# EAGLE board Board - Remote Monitoring Hardware (EAGLE 8.1.0)
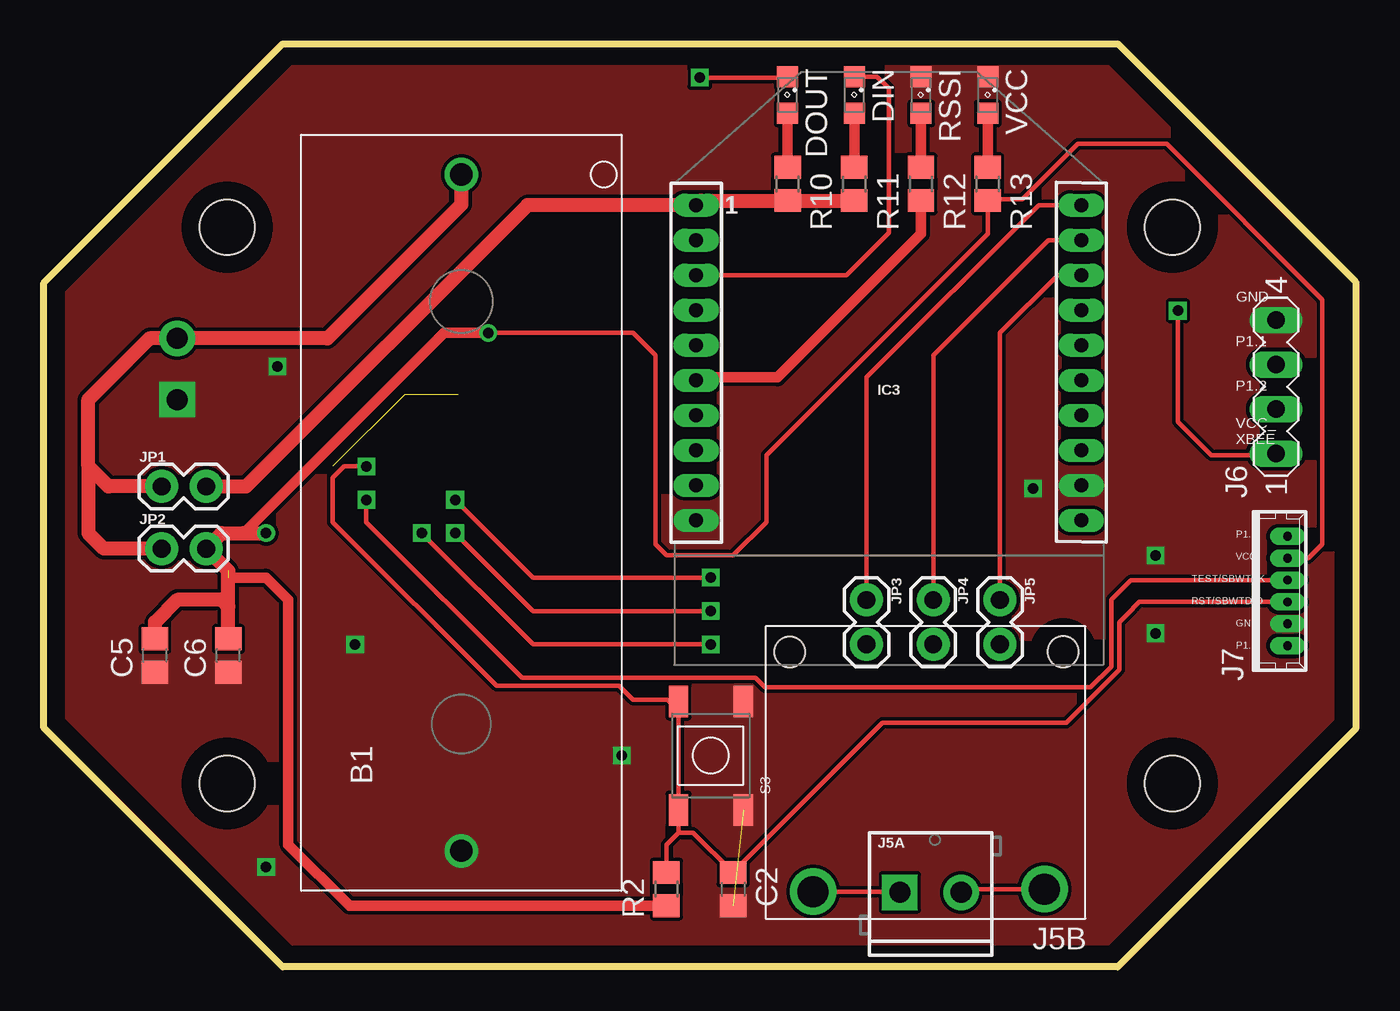
[diagram p0: board, top side]
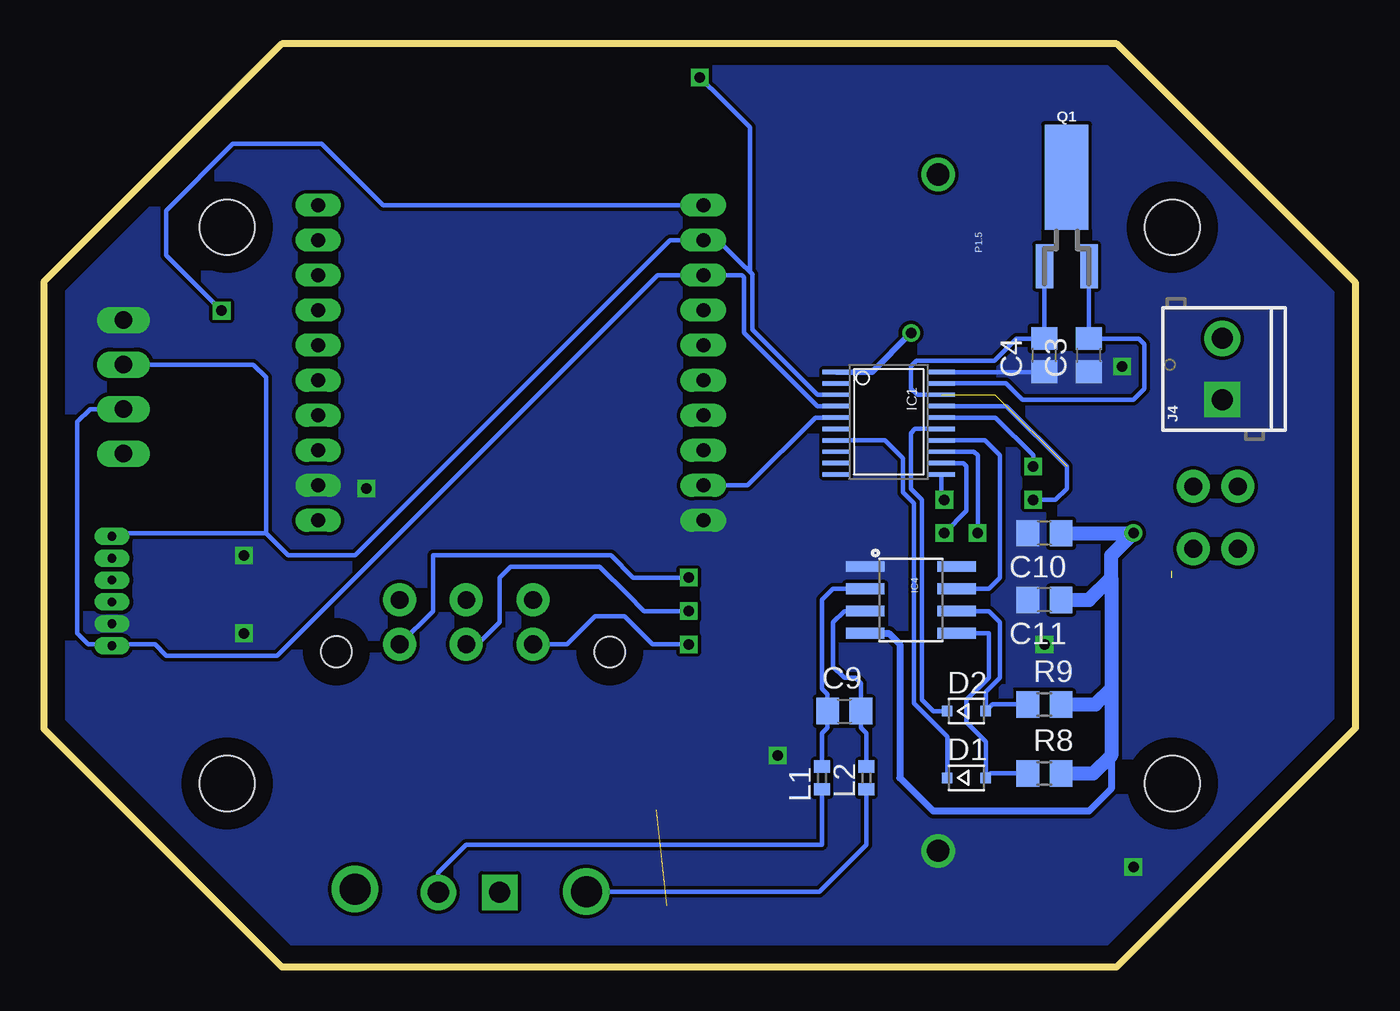
[diagram p1: board, bottom side, seen from below]

Size 74.93 x 52.7 mm. Coordinates in mm from the lower left corner, seen from the top.
Outline: 13.65,52.7 61.34,52.7 74.93,39.12 74.93,13.59 61.34,0 13.65,0 0,13.65 0,39.05 13.65,52.7
Copper layers (1*16): Top 0.035mm / dielectric 1.5mm / Bottom 0.035mm
Design rules "default *": minimum track width 7mil, minimum drill 7mil, track to track 5mil, track to pad 5mil, pad to pad 5mil, via to via 5mil, smd to smd 5mil, copper to edge 40mil, drill to drill 8mil, minimum pad ring 10mil, minimum via ring 8mil, stop-mask expansion 4mil, vias tented up to drill 0mil, thermal gap 10mil
Net classes: 0 default: width 0.203 mm, clearance 0.205 mm; 1 vcc: width 0.305 mm
Holes 3.17 mm at 10.48,42.23 64.45,42.23 64.45,10.48 10.48,10.48

## Footprints (pad centres in the part's own frame; a part is rotated, then mirrored left to right if it is on the bottom)
BATT_HLDR_2/3A_THRUHOLE = drill 1.27: NEG -19.05,0; POS 19.558,0
C0805 = smd 1.3 x 1.5: 1 -0.95,0; 2 0.95,0
SOD323-R = smd 0.6 x 0.6: A 1.1,0; C -1.1,0
SML0805 = smd 1.2 x 1.2: A 1.05,0; C -1.05,0
MSP430G2553IPW20 = smd 1.55 x 0.25: 1 -3,2.85; 2 -3,2.2; 3 -3,1.55; 4 -3,0.9; 5 -3,0.25; 6 -3,-0.4; 7 -3,-1.05; 8 -3,-1.7; 9 -3,-2.35; 10 -3,-3; 11 3,-3; 12 3,-2.35; 13 3,-1.7; 14 3,-1.05; 15 3,-0.4; 16 3,0.25; 17 3,0.9; 18 3,1.55; 19 3,2.2; 20 3,2.85
XBEE-LONGPAD = drill 0.8 pad 1.206 long: 1 -11,20; 2 -11,18; 3 -11,16; 4 -11,14; 5 -11,12; 6 -11,10; 7 -11,8; 8 -11,6; 9 -11,4; 10 -11,2; 11 11,2; 12 11,4; 13 11,6; 14 11,8; 15 11,10; 16 11,12; 17 11,14; 18 11,16; 19 11,18; 20 11,20
SOIC8 = smd 0.61 x 2.21: 1 -1.905,-2.616; 2 -0.635,-2.616; 3 0.635,-2.616; 4 1.905,-2.616; 5 1.905,2.616; 6 0.635,2.616; 7 -0.635,2.616; 8 -1.905,2.616
SCREWTERMINAL-3.5MM-2 = drill 1.2 pad 2.032 square: 1 0,0 | drill 1.2 pad 2.032: 2 3.5,0
PCC-SMP = drill 1.77 pad 2.54: T+ 13.207,0.14; T- 0,0 | hole 1.77: 14.542,-13.542; -1.068,-13.552
MA04-1 = drill 1.016 long: 1 -3.81,0; 2 -1.27,0; 3 1.27,0; 4 3.81,0
53047-06 = drill 0.5 pad 0.698 long: 1 3.125,0.45; 2 1.875,0.45; 3 0.625,0.45; 4 -0.625,0.45; 5 -1.875,0.45; 6 -3.125,0.45
1X02 = drill 1.016 pad 1.88: 1 0,0; 2 2.54,0
0402 = smd 0.7 x 0.9: 1 -0.65,0; 2 0.65,0
CRYSTAL-SMD-2X6-CYL = smd 2.5 x 6: SHEILD 0,5.08 | smd 1 x 2.5: X1 -1.27,0; X2 1.27,0
R0805 = smd 1.3 x 1.5: 1 -0.95,0; 2 0.95,0
KPT-1187B = smd 1.8 x 1.1: 1 -3.1,1.85; 2 3.1,1.85; 3 -3.1,-1.85; 4 3.1,-1.85

## Placement (x,y rotation side)
B1  BATT_HLDR_2/3A_THRUHOLE  [BATT_HLDR_2/3A_THRUHOLE]  23.85,25.68 90 top
C2  1nF  [C0805]  39.37,4.45 270 top
C3  12pF  [C0805]  15.24,34.92 90 bottom
C4  12pF  [C0805]  17.78,34.92 90 bottom
C5  10uF/10V  [C0805]  6.35,17.78 90 top
C6  100nF  [C0805]  10.54,17.78 90 top
C9  0.01uF  [C0805]  29.21,14.61 0 bottom
C10  10uF  [C0805]  17.78,24.77 180 bottom
C11  10uF  [C0805]  17.78,20.95 180 bottom
D1  1N4148  [SOD323-R]  22.23,10.79 0 bottom
D2  1N4148  [SOD323-R]  22.23,14.61 0 bottom
DIN  LED4  [SML0805]  46.29,49.78 270 top
DOUT  LED3  [SML0805]  42.48,49.78 270 top
IC1  MSP430G2553  [MSP430G2553IPW20]  26.67,31.11 0 bottom
IC3  Xbee S3 Socket  [XBEE-LONGPAD]  48.26,23.5 0 top
IC4  MAX31855T  [SOIC8]  25.4,20.95 270 bottom
J4  [SCREWTERMINAL-3.5MM-2]  7.62,32.38 90 bottom
J5A  [SCREWTERMINAL-3.5MM-2]  48.9,4.25 0 top
J5B  PCC-SMP  [PCC-SMP]  57.15,4.45 180 top
J6  [MA04-1]  70.38,33.12 90 top
J7  [53047-06]  70.59,21.46 270 top
JP1  [1X02]  6.73,27.43 0 top
JP2  [1X02]  6.73,23.88 0 top
JP3  [1X02]  46.99,20.95 270 top
JP4  [1X02]  50.8,20.95 270 top
JP5  [1X02]  54.61,20.95 270 top
L1  Ferrite  [0402]  30.48,10.79 270 bottom
L2  Ferrite  [0402]  27.94,10.79 90 bottom
Q1  32.768kHz  [CRYSTAL-SMD-2X6-CYL]  16.51,40 0 bottom
R2  47k  [R0805]  35.56,4.45 270 top
R8  10k  [R0805]  17.78,11.05 0 bottom
R9  10k  [R0805]  17.78,14.99 0 bottom
R10  1k  [R0805]  42.48,44.7 270 top
R11  1k  [R0805]  46.29,44.7 270 top
R12  1k  [R0805]  50.1,44.7 270 top
R13  1k  [R0805]  53.91,44.7 270 top
RSSI  LED5  [SML0805]  50.1,49.78 270 top
S3  SMD-PUSHBTN-SWTVER1  [KPT-1187B]  38.1,12.06 90 top
VCC  LED7  [SML0805]  53.91,49.78 270 top

## Library data of the parts
B1 IC1 J5B S3 = custom parts
C2-C6 C9-C11 = eagle-ltspice; SPICEMODEL: NONE; SPICEPREFIX: C
D1 D2 = diode
DIN DOUT RSSI VCC = led
IC3 = SparkFun-RF
IC4 = SparkFun-Retired; PROD_ID: IC-12512
J4 J5A = SparkFun-Connectors; PROD_ID: CONN-08399
J6 = con-lstb; OC_FARNELL: unknown; OC_NEWARK: unknown
J7 = con-molex; MPN: 53047-0610-C; OC_FARNELL: 9733078; OC_NEWARK: 03M2965
JP1-JP5 = SparkFun-Retired
L1 L2 = inductors
Q1 = SparkFun-Clocks; PROD_ID: XTAL-07894
R2 R8-R13 = eagle-ltspice; SPICEMODEL: NONE; SPICEPREFIX: R

## Nets
1: D1.A IC4.5 R8.1
2: D2.A IC4.6 R9.1
DIO0: IC3.20 JP3.1
DIO1: IC3.19 JP4.1
DIO2: IC3.18 JP5.1
DIO3: IC3.17
DIO4: IC3.11
DIO5: IC3.15
DIO9: IC3.13
DIO11: IC3.7
DIO12: IC3.4
GND: B1.NEG C2.2 C3.1 C4.1 C5.1 C6.1 C10.2 C11.2 IC1.20 IC3.10 IC3.12 IC4.1 J4.1 J6.4 J7.2 RSSI.C S3.3 S3.4 VCC.C
N$1: B1.POS J4.2 JP1.1 JP2.1
N$4: DOUT.A R10.1
N$10: DIN.A R11.1
N$11: R12.1 RSSI.A
N$12: C9.1 IC4.2 L1.1
N$13: C9.2 IC4.3 L2.2
N$14: J5A.2 J5B.T- L1.2
N$15: J5A.1 J5B.T+ L2.1
N$17: R13.1 VCC.A
P1.0: IC1.2
P1.1: DOUT.C IC1.3 IC3.2 J6.3 J7.6
P1.2: DIN.C IC1.4 IC3.3 J6.2 J7.1
P1.3: IC1.5 IC3.9
P1.4: IC1.6
P1.5: D1.C IC1.7
P1.6: IC1.14 IC4.7
P1.7: D2.C IC1.15
P2.0: IC1.8
P2.1: IC1.9
P2.2: IC1.10
P2.3: IC1.11 JP5.2
P2.4: IC1.12 JP4.2
P2.5: IC1.13 JP3.2
RES1: IC3.8
RES2: IC3.14
RESET: IC3.5
RSSI: IC3.6 R12.2
RST/SBWTDIO: C2.1 IC1.16 J7.3 R2.1 S3.1 S3.2
RTS: IC3.16
TEST/SBWTCK: IC1.17 J7.4
VCC: C5.2 C6.2 C10.1 C11.1 IC1.1 IC4.4 J7.5 JP2.2 R2.2 R8.2 R9.2 R13.2
VCC_XBEE: IC3.1 J6.1 JP1.2 R10.2 R11.2
XINR: C3.2 IC1.19 Q1.X2
XOUTR: C4.2 IC1.18 Q1.X1

## Tracks (layer width: path | path; a pad name or v marks a point on that pad's centre or on a via)
1
  Bottom 0.254: R8.1 20.87,11.05 D1.A 21.13,12.87 22.23,13.97 22.23,15.25 20.96,16.52 20.96,19.04 | 20.96,19.04 20.96,19.05 | IC4.5 20.97,19.05 20.96,19.04
2
  Bottom 0.254: R9.1 20.74,14.99 D2.A 21.13,15.71 20.32,16.51 20.32,19.68 20.96,20.32 IC4.6
DIO0
  Top 0.254: 58.1,43.5 IC3.20 56.83,43.5 46.99,33.66 JP3.1
DIO1
  Top 0.254: JP4.1 50.8,34.92 57.37,41.49 IC3.19
DIO2
  Top 0.254: IC3.18 57.91,39.49 54.61,36.2 JP5.1
GND  (via drill 0.6)  (1 unrouted)
  Bottom 0.254: IC1.20 C4.1
  other vias: 63.5,19.05 56.52,27.3 33.02,12.06 12.7,5.71 17.78,18.41 13.34,34.29 63.5,23.5
  pour Top (no thermals): 0,38.73 0,13.33 0.32,13.33 13.97,-0.32 61.21,-0.32 61.53,-0.64 61.53,0.06 75.18,13.72 75.18,39.18 75.76,39.75 74.49,39.75 61.53,52.7 13.97,52.7
  pour Bottom (no thermals): 0,38.73 0,13.33 13.97,-0.64 60.96,-0.64 74.93,13.33 74.93,38.73 60.96,52.7 13.97,52.7
N$1
  Top 0.813: B1.POS 23.85,43.54 16.2,35.88 J4.2 6.04,35.88 2.54,32.38 2.54,28.57 | 2.54,28.57 2.54,24.77 3.43,23.88 JP2.1 | JP1.1 3.68,27.43 2.54,28.57
N$4
  Top 0.61: R10.1 DOUT.A
N$10
  Top 0.61: R11.1 DIN.A
N$11
  Top 0.61: R12.1 RSSI.A
N$12
  Bottom 0.254: L1.1 30.48,13.33 30.16,13.65 C9.1 30.16,15.55 30.48,15.88 30.48,20.95 29.85,21.59 IC4.2
N$13
  Bottom 0.254: L2.2 27.94,13.33 28.26,13.65 C9.2 28.26,16.2 28.58,16.51 29.21,16.51 29.85,17.14 29.85,19.68 29.21,20.32 IC4.3
N$14
  Top 0.254: J5B.T- 52.59,4.45 J5A.2
  Bottom 0.254: J5A.2 52.4,5.39 52.07,5.71 | 52.07,5.71 50.8,6.98 | L1.2 30.48,6.98 50.8,6.98 | 50.8,6.98 52.07,5.71
N$15
  Top 0.254: J5B.T+ 48.85,4.3 J5A.1
  Bottom 0.254: L2.1 27.94,6.98 30.62,4.3 J5B.T+
N$17
  Top 0.61: R13.1 VCC.A
P1.1  (via drill 0.6)
  Top 0.254: v37.47,50.77 42.42,50.77 DOUT.C
  Bottom 0.254: 34.6,39.7 34.86,39.95 34.87,39.95 36.42,41.49 IC3.2 39.15,41.49 57.15,23.5 60.96,23.5 62.23,24.77 | 34.6,39.7 34.47,39.56 34.47,36.38 30.75,32.66 IC1.3 | 34.6,39.7 34.6,47.94 36.83,50.16 36.86,50.16 v37.47,50.77 | 70.86,24.77 J7.6 70.86,24.77 | 62.23,24.77 62.23,33.66 62.97,34.39 J6.3 | 62.23,24.77 70.86,24.77
P1.2
  Top 0.254: DIN.C 47.59,50.83 48.26,50.16 48.26,41.91 45.85,39.49 IC3.3
  Bottom 0.254: IC1.4 30.75,32.02 34.93,36.2 34.93,39.37 35.05,39.49 IC3.3 39.88,39.49 61.6,17.78 67.95,17.78 68.58,18.41 70.96,18.41 | J7.1 70.96,18.41 | 70.96,18.41 J7.1 | J6.2 72.29,31.85 73.03,31.11 73.03,19.05 72.39,18.41 71.11,18.41 J7.1
P1.3
  Bottom 0.254: IC1.5 30.87,31.36 34.74,27.5 IC3.9
P1.5
  Bottom 0.254: D1.C 23.33,13.15 25.22,15.05 25.22,26.48 25.86,27.11 25.86,29.03 | IC1.7 26.89,30.06 26.04,29.21 | 26.04,29.21 25.86,29.03 | 25.86,29.03 26.04,29.21
P1.6
  Bottom 0.254: IC4.7 20.96,21.59 20.32,22.23 20.32,29.21 21.18,30.06 IC1.14
P1.7
  Bottom 0.254: IC1.15 25.17,30.71 25.4,30.48 25.4,27.3 24.77,26.67 24.77,15.24 24.13,14.61 D2.C
P2.3  (via drill 0.6)
  Top 0.254: v23.5,26.67 27.94,22.23 v38.1,22.23
  Bottom 0.254: IC1.11 23.67,26.84 v23.5,26.67 | JP5.2 52.71,20.32 52.71,23.5 42.55,23.5 41.28,22.23 v38.1,22.23
P2.4  (via drill 0.6)
  Top 0.254: v23.5,24.77 27.94,20.32 v38.1,20.32
  Bottom 0.254: IC1.12 22.42,28.77 22.23,28.57 22.23,26.04 v23.5,24.77 | JP4.2 50.17,18.41 48.9,19.68 48.9,22.23 48.26,22.86 43.18,22.86 41.59,21.27 | 41.91,21.59 41.59,21.27 | 41.59,21.27 40.64,20.32 v38.1,20.32
P2.5  (via drill 0.6)
  Top 0.254: v21.59,24.77 27.94,18.41 v38.1,18.41
  Bottom 0.254: IC1.13 21.8,29.41 21.59,29.21 v21.59,24.77 | JP3.2 45.05,18.41 43.45,20.02 41.77,20.02 40.17,18.41 v38.1,18.41
RSSI
  Top 0.61: R12.2 50.1,41.85 41.91,33.66 37.42,33.66 IC3.6
RST/SBWTDIO  (via drill 0.6)
  Top 0.254: 36.25,7.68 S3.1 36.25,14.61 | 36.25,7.68 35.56,6.98 R2.1 | 36.25,14.61 S3.2 | 36.25,7.68 37.09,7.68 C2.1 47.91,13.93 58.4,13.93 61.42,16.95 61.42,19.68 61.83,20.09 | 36.25,14.61 35.62,15.24 33.66,15.24 32.84,16.05 26.67,16.05 26.29,16.05 25.86,16.05 16.51,25.4 16.51,27.94 17.15,28.57 v18.42,28.57 | 61.83,20.09 62.57,20.84 | J7.3 62.57,20.84 | 62.57,20.84 61.83,20.09
  Bottom 0.254: v18.42,28.57 18.42,29.21 20.57,31.36 IC1.16
TEST/SBWTCK  (via drill 0.6)
  Top 0.254: v18.42,26.67 18.42,25.4 27.31,16.51 40.64,16.51 41.19,15.96 58.42,15.96 59.05,15.96 59.77,15.96 60.96,17.14 60.96,20.95 62.09,22.09 J7.4
  Bottom 0.254: IC1.17 19.95,32.02 16.51,28.57 16.51,27.3 17.15,26.67 v18.42,26.67
VCC  (via drill 0.6)  (1 unrouted)
  Top 0.254: J7.5 72.23,23.34 73.03,24.13 73.03,38.1 64.14,46.99 59.06,46.99 55.88,43.81 53.97,43.81 R13.2 53.91,41.85 41.28,29.21 41.28,25.4 39.37,23.5 35.56,23.5 34.93,24.13 34.93,34.92 33.66,36.2 v25.4,36.2
  Top 0.61: 10.54,22.23 12.7,22.23 13.97,20.95 13.97,6.98 17.46,3.5 R2.2 | 11.43,24.77 22.86,36.2 v25.4,36.2
  Top 0.813: C5.2 6.35,19.68 7.62,20.95 10.16,20.95 10.54,20.57 | C6.2 10.54,20.57 | 10.54,20.57 10.54,22.61 JP2.2 10.16,24.77 11.43,24.77 v12.7,24.77
  Bottom 0.305: IC1.1 27.63,33.97 v25.4,36.2
  Bottom 0.406: 13.97,12.06 13.97,10.16 15.24,8.89 24.13,8.89 26.04,10.79 26.04,18.41 26.67,19.05 IC4.4
  Bottom 0.813: 13.97,15.88 13.97,12.06 14.99,11.05 R8.2 | 13.97,22.23 13.97,15.88 | 13.97,22.23 13.97,23.5 v12.7,24.77 C10.1 | R9.2 14.86,14.99 13.97,15.88 | C11.1 15.24,20.95 13.97,22.23
VCC_XBEE  (via drill 0.6)
  Top 0.254: v64.77,37.47 64.77,31.11 66.68,29.21 70.28,29.21 J6.1
  Top 0.813: JP1.2 11.56,27.43 27.62,43.5 IC3.1 37.52,43.75 R10.2 R11.2
  Bottom 0.254: IC3.1 55.56,43.5 59.06,46.99 64.14,46.99 67.95,43.18 67.95,40.64 v64.77,37.47
XINR
  Bottom 0.254: Q1.X2 C3.2 12.38,35.88 12.07,35.56 12.07,33.02 12.7,32.38 19.05,32.38 19.98,33.31 IC1.19
XOUTR  (2 unrouted)
  Bottom 0.254: Q1.X1 C4.2 19.37,35.88 20.64,34.6 25.09,34.6 25.4,34.29 25.4,33.02 25.05,32.66 IC1.18

## Text on the board
tNames: GND | P1.1 | P1.2 | VCC_ / XBEE | P1.1 | VCC | TEST/SBWTCK | RST/SBWTDIO | GND | P1.2
bNames: P1.5